# Altium PCB Main.PcbDoc
Units mil, origin at the board's own origin, x right, y up, seen from the top; angles counter-clockwise.
Board outline 1320 x 1790 mil, 2 copper layers (Top Layer, Bottom Layer); 8 components, 11 nets, 37 pads, 11 vias.
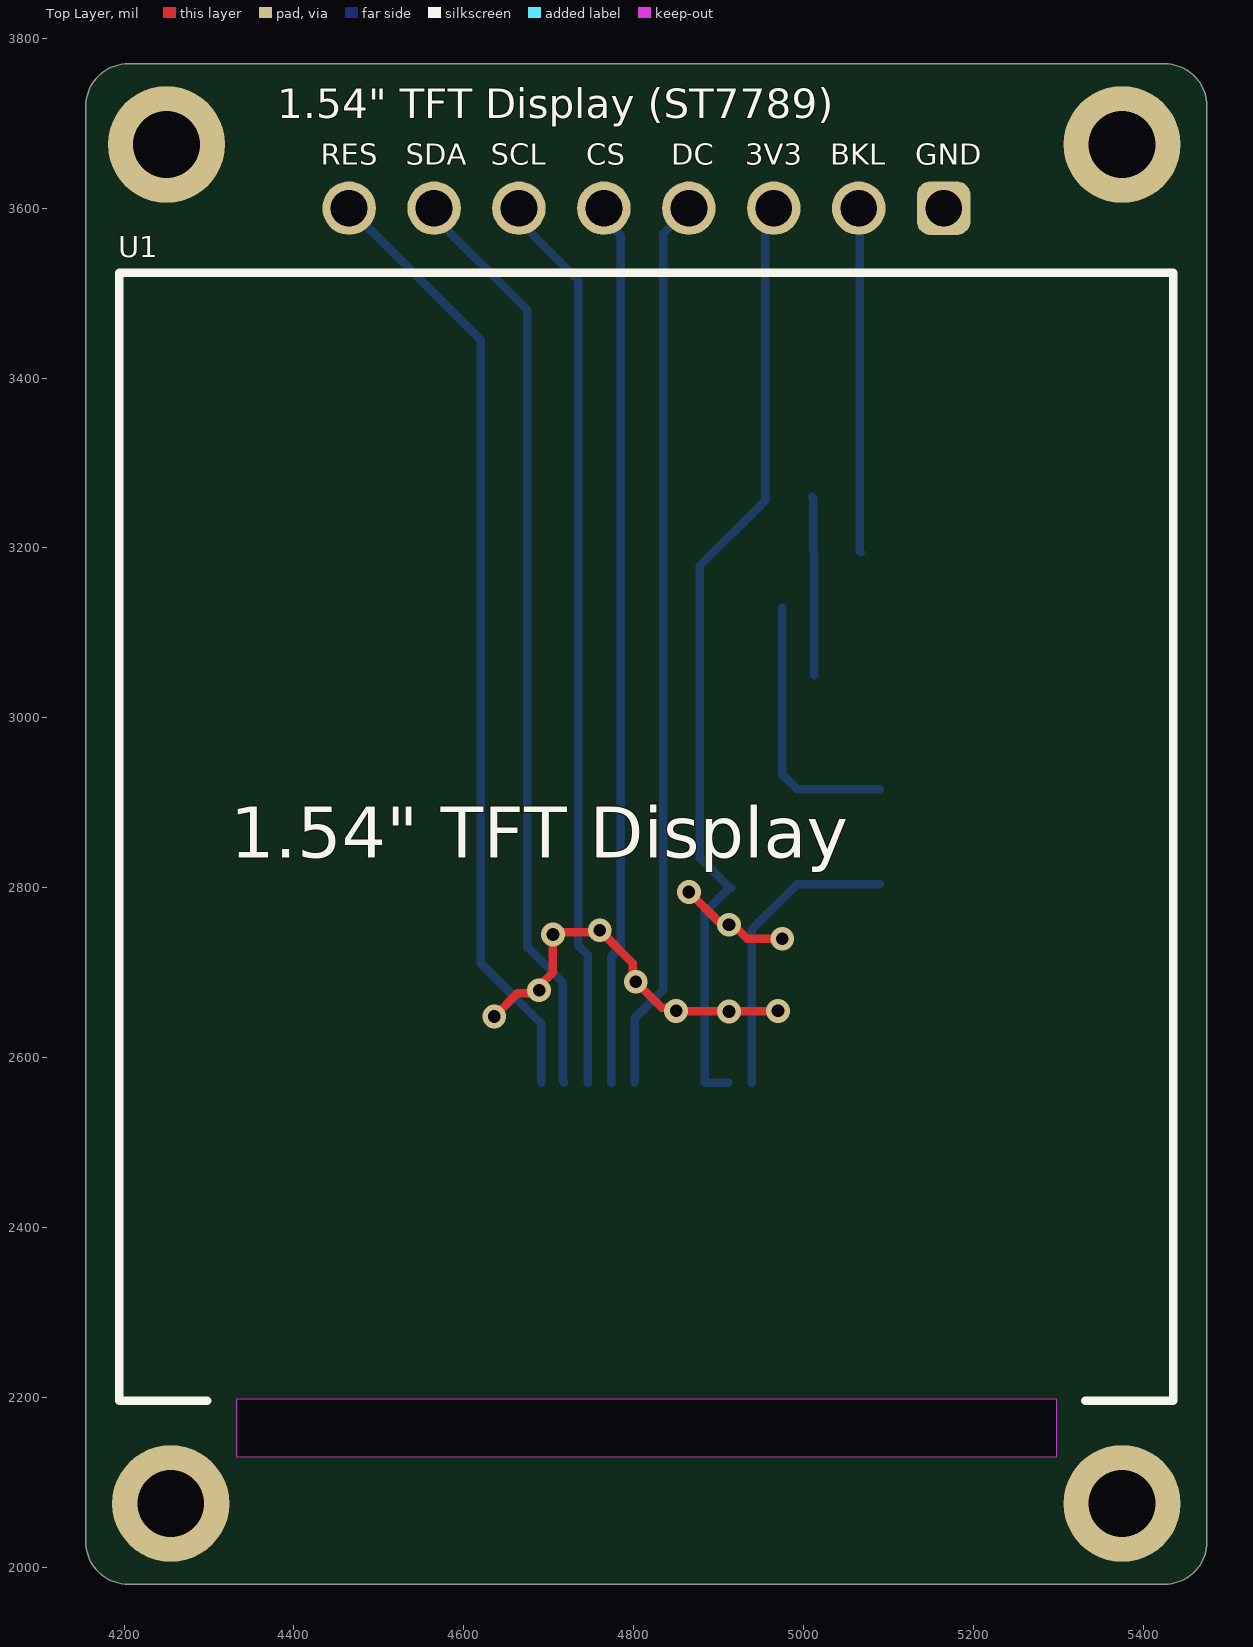
[diagram p0: Top Layer view]
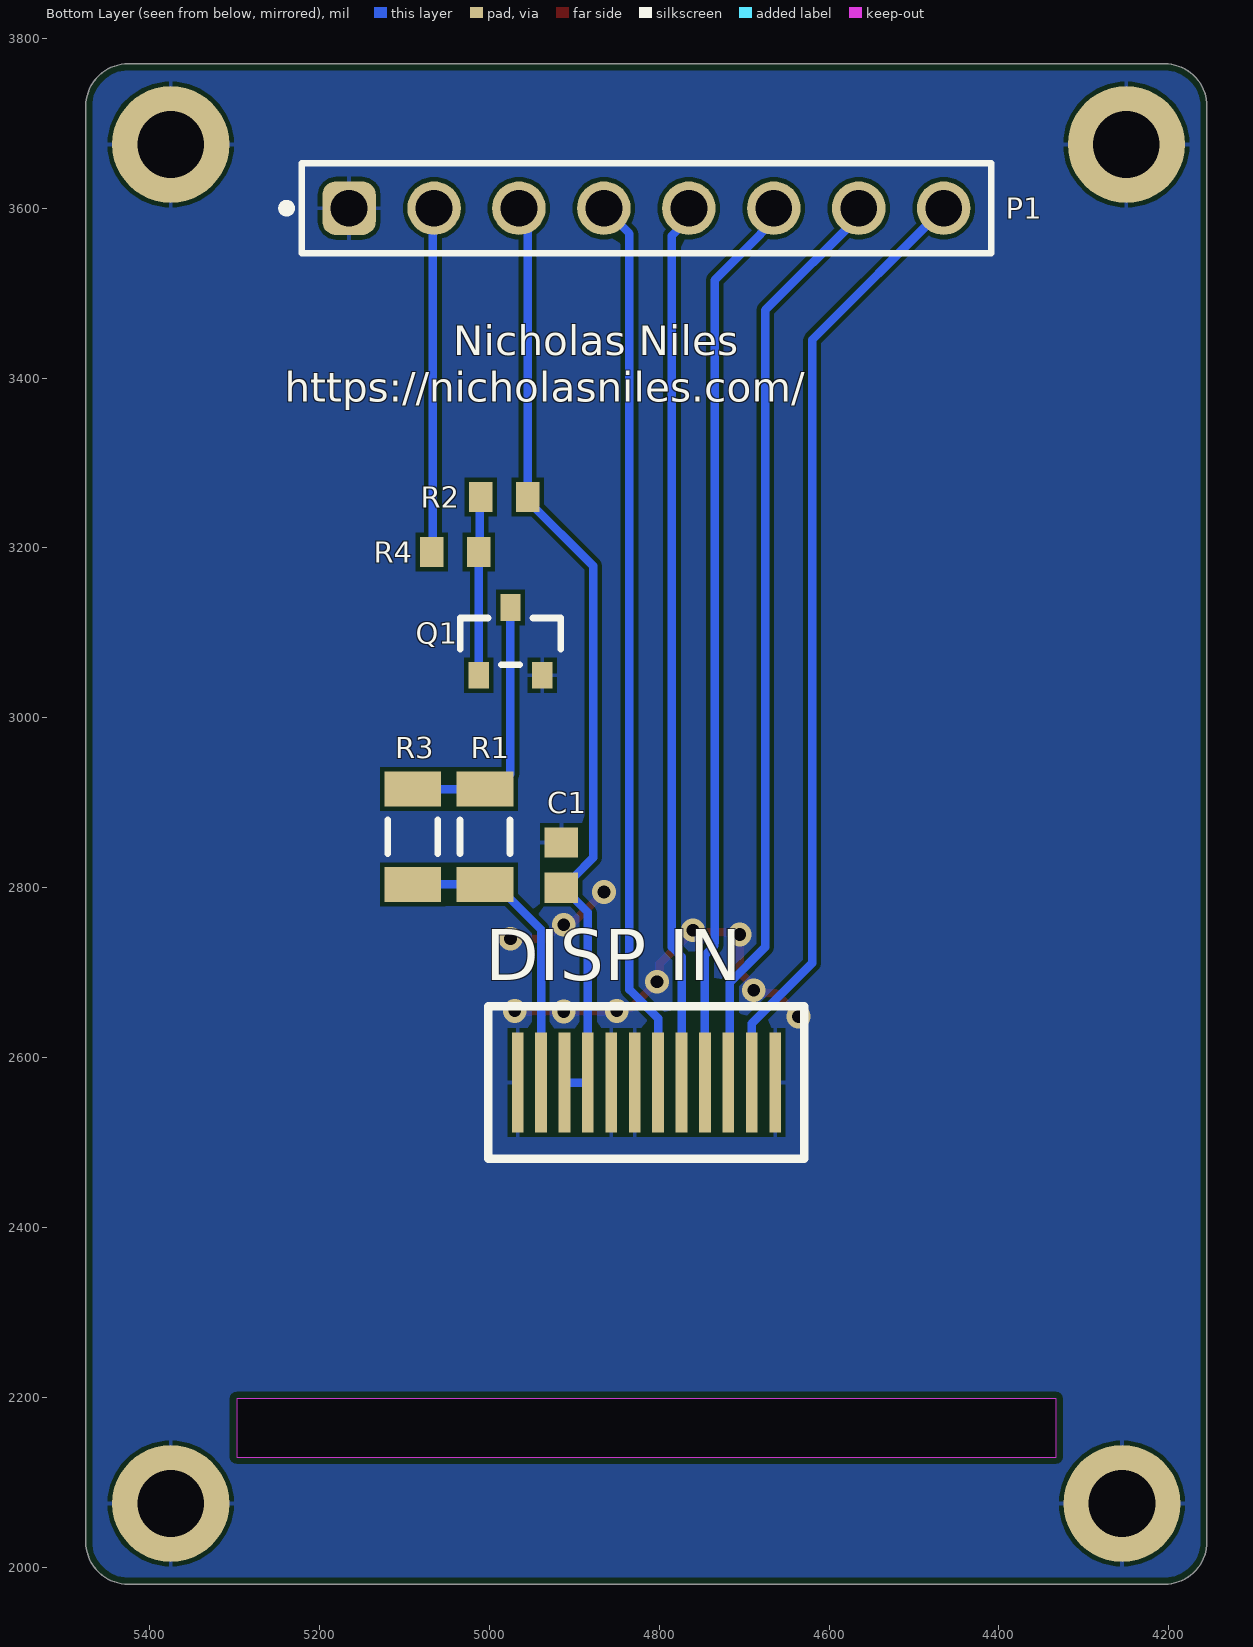
[diagram p1: Bottom Layer view, seen from below]

## Layer stack, top to bottom
Top Solder: solder mask 0.4, Solder Resist, Dk 3.5
Top Layer: signal copper 1.4
Dielectric 1: dielectric 12.6, FR-4, Dk 4.8
Bottom Layer: signal copper 1.4
Bottom Solder: solder mask 0.4, Solder Resist, Dk 3.5

## Board outline
4155,2030 4155,3720 cw(c4205,3720) 4205,3770 5425,3770 cw(c5425,3720) 5475,3720 5475,2030 cw(c5425,2030) 5425,1980 4205,1980 cw(c4205,2030)

## Design rules (kind name [scope] priority, off if disabled: settings)
BoardOutlineClearance [All] p1: gap=7.87 ignorepadtopadclearanceinfootprint=FALSE
Clearance [All] p1: gap=5 ignorepadtopadclearanceinfootprint=TRUE except(10: Arc-Hole Track-Hole SMDPad-Hole THPad-Hole Via-Hole Fill-Hole Poly-Hole Region-Hole Text-Hole)
ComponentClearance [All] p1: gap=5 collisioncheckmode=3 verticalgap=5 showdistances=TRUE
DiffPairsRouting [All] p1: maxlimit=10 minlimit=5 mostfreqgap=5 toplayer_minwidth=5 toplayer_maxwidth=1000 toplayer_prefwidth=5 bottomlayer_minwidth=5 bottomlayer_maxwidth=1000 bottomlayer_prefwidth=5 maxuncoupledlength=500
Height [All] p1: minheight=0 maxheight=71497.94 prefheight=500
HoleSize [All] p1: absolutevalues=TRUE maxlimit=248.03 minlimit=11.81 maxpercent=80.000 minpercent=20.000
HoleToHoleClearance [All] p1: gap=10 allowstackedmicrovias=FALSE
MinimumAnnularRing [All] p1: minimumring=6
MinimumSolderMaskSliver [All] p1: minsoldermaskwidth=6
PlaneClearance [All] p1: clearance=5
PlaneConnect PlaneConnectPowerPads [InPadClass('PowerPads')] p1: planeconnectstyle=Direct reliefexpansion=20 reliefentries=4 reliefconductorwidth=10 reliefairgap=10
PlaneConnect [All] p2: pad.planeconnectstyle=Relief pad.reliefexpansion=11.81 pad.reliefentries=4 pad.reliefconductorwidth=5 pad.reliefairgap=5 via.planeconnectstyle=Direct via.reliefexpansion=11.81 via.reliefentries=4 via.reliefconductorwidth=5 via.reliefairgap=5
PolygonConnect PolygonConnectPowerPads [All vs (InPadClass('PowerPads'))] p1: connectstyle=Direct reliefconductorwidth=10 reliefentries=4 polygonreliefangle="90 Angle" airgapwidth=10
PolygonConnect [All] p2: thpad.connectstyle=Relief thpad.reliefconductorwidth=5 thpad.reliefentries=4 thpad.polygonreliefangle="90 Angle" thpad.airgapwidth=5 smdpad.connectstyle=Relief smdpad.reliefconductorwidth=5 smdpad.reliefentries=4 smdpad.polygonreliefangle="90 Angle" smdpad.airgapwidth=5 via.connectstyle=Direct via.reliefconductorwidth=5 via.reliefentries=4 via.polygonreliefangle="90 Angle" via.airgapwidth=5
RoutingVias [All] p1: holewidth=11.81 width=23.62 viastyle="Through Hole" minholewidth=11.81 minwidth=23.62 maxholewidth=23.62 maxwidth=259.84
SilkToSilkClearance [All] p1: silktosilkclearance=5
SilkToSolderMaskClearance [IsPad] p1: minsilkscreentomaskgap=5 clearancetoexposedcopper=TRUE
SolderMaskExpansion [All] p1: expansion=2 istentingtop=FALSE
SupplyNets "Schematic Supply Nets_1" [InNet('3V3')] p1: voltage=0.000
SupplyNets "Schematic Supply Nets" [InNet('GND')] p2: voltage=0.000
UnRoutedNet [All] p1: checkbadconnections=TRUE
Width Width_10mil [All] p1: maxlimit=1000 minlimit=10 preferedwidth=10 minimp=50.000000 maximp=50.000000 favimp=50.000000
Width Width_6mil [All] p2: maxlimit=1000 minlimit=6 preferedwidth=6 minimp=50.000000 maximp=50.000000 favimp=50.000000
Width Power_20mil [All] p3: maxlimit=1000 minlimit=20 preferedwidth=20 minimp=50.000000 maximp=50.000000 favimp=50.000000
Width Power_12mil [All] p4: maxlimit=1000 minlimit=12 preferedwidth=12 minimp=50.000000 maximp=50.000000 favimp=50.000000
Width Width_5mil [All] p5: maxlimit=1000 minlimit=5 preferedwidth=5 minimp=50.000000 maximp=50.000000 favimp=50.000000
19 further rules are at their usual default settings.

## Components (designator, comment, footprint, x,y, rotation, side; value= is the part's Value field where it differs from the comment)
C1 "100nF" CAPC1608X87X35NL15T15 4915,2826.57 r90 bottom
P1 "61300811121" 61300811121 4815,3600 r180 bottom locked
Q1 "SS8050-G" FP-SS8050-G-MFG 4975,3090 r90 bottom
R1 "20" RESC3116X65X40NL10T20 5005,2860 r270 bottom
R2 "10k" RESC1608X55X25NL10T15 4982.44,3260 r180 bottom
R3 "20" RESC3116X65X40NL10T20 5090,2860 r270 bottom
R4 "1k" RESC1608X55X25NL10T15 5040,3195 r180 bottom
U1 "1.54\" TFT Display" PCBComponent_1 4815,2860 r0 top locked

## Footprints (in the part's own frame and the unit in brackets; to place one, negate y for a bottom-side part, rotate by r counter-clockwise, add the part's x,y. Pads: shape width x height; smd on the part's side, far side on the other; paste and mask are expansions set on the pad)
61300811121 [mm] "Pin Header, pitch 2.54 mm, THT, Vertical, single row, 8p"
  rrect50% 1.6x1.6 hole 1.1: 1(-8.89,0)
  round 1.6 hole 1.1: 2(-6.35,0) 3(-3.81,0) 4(-1.27,0) 5(1.27,0) 6(3.81,0) 7(6.35,0) 8(8.89,0)
  silkscreen extent -10.88,-1.35 10.31,1.35, body extent -10.16,-1.27 10.16,1.27, height 8.57
CAPC1608X87X35NL15T15 [mm] "Chip Capacitor, 2-Leads, Body 1.60x0.80mm, IPC Medium Density"
  rect 0.9x1 smd: 1(-0.675,0) 2(0.675,0)
  body extent -0.87,-0.48 0.87,0.47, height 0.87
FP-SS8050-G-MFG [mm]
  rect 0.8x0.6 smd paste+0 mask+0: 1(-1.01,0.95) 2(-1.01,-0.95) 3(1.01,0)
  silkscreen extent -0.7,-1.5 0.7,1.5, body extent -1.21,-1.45 1.21,1.45, height 1.15
PCBComponent_1 [mm]
  rect 0x0 / inner rect 1.524x1.524 / far side rect 0.35x3 all layers, no hole mask+0: 1(3.85,-7.35) 2(3.15,-7.35) 3(2.45,-7.35) 4(1.75,-7.35) 5(1.05,-7.35) 6(0.35,-7.35) 7(-0.35,-7.35) 8(-1.05,-7.35) 9(-1.75,-7.35) 10(-2.45,-7.35) 11(-3.15,-7.35) 12(-3.85,-7.35)
  Keep-Out Layer board cut-out: -12.25,-16.8 12.25,-16.8 12.25,-18.55 -12.25,-18.55
  silkscreen extent -15.76,-16.86 15.76,16.86
RESC1608X55X25NL10T15 [mm] "Chip Resistor, 2-Leads, Body 1.60x0.80mm, IPC Medium Density"
  rect 0.7x0.9 smd: 1(-0.7,0) 2(0.7,0)
  body extent -0.85,-0.45 0.85,0.45, height 0.55
RESC3116X65X40NL10T20 [mm] "Chip Resistor, 2-Leads, Body 3.10x1.60mm, IPC Medium Density"
  rect 1.05x1.7 smd: 1(-1.425,0) 2(1.425,0)
  silkscreen extent -0.5,-0.75 0.5,0.75, body extent -1.6,-0.85 1.6,0.85, height 0.65

## Part data
C1: library part CMP-2006-03301-1
P1: library part CMP-1502-01076-4, "THT Vertical Pin Header WR-PHD, Pitch 2.54 mm, Single Row, 8 pins", Color=Black, Contact Resistance=20mΩ, Current Rating=3A, Max Operating Temperature=105°C, Min Operating Temperature=-40°C, Operating Supply Voltage=250V, Connector Type="Male Pin", Contact Material=Gold, Contact Mating Length=5.9944mm, Contact Plating=Gold, Gender=Male, Height=8.54mm, Lead Pitch=2.54mm, Mount="Through Hole", Number of Contacts=8, Number of Pins=8, Number of Positions=8, Number of Rows=1, Orientation=Vertical, Packaging=Bulk, Pitch=2.54mm, RoHS=Compliant, Termination=Solder, Voltage Rating=250V
Q1: library part CMP-20235-000001-1, "NPN TRANSISTOR 1.5A 40V SOT-23 R", Case/Package=TO-236-3, Collector Emitter Breakdown Voltage=25V, Collector Emitter Voltage (VCEO)=400mV, Max Collector Current=1.5A, Max Power Dissipation=300mW, Transition Frequency=100MHz, Max Breakdown Voltage=25V, Mount="Surface Mount", Packaging="Tape and Reel", RoHS Compliant=Yes
R1 R3: library part CMP-2003-03957-1, Manufacturer=Yageo, Part Number=RC1206JR-0720RL
R2 R4: library part CMP-2000-04525-1, Manufacturer=Yageo, Part Number=RT0603BRE071KL

## Free pads (board coordinates)
  round 137.79 hole 78.74: 7(4250,3675) 7(4255,2075) 7(5375,2075) 7(5375,3675)

## Via types
v1: diameter 28, hole 15, Top Layer to Bottom Layer, tented both sides, 11 vias

## Nets (pads, with @x,y where several pads share a name; then routed paths per layer and width w, separated by ;. In a path a pad name is that pad's centre, name@x,y a point inside that pad or via, vN(x,y) a via of type N, cw(c..) or ccw(c..) an arc to the next point about the centre after c; other vN are vias at no path point)
3V3: C1.1 P1.3 R2.2 U1.3 U1.4 | length 1123.8
  Bottom Layer w10: U1.3 U1.4 4883.9,2770.87 C1.1@4913.03,2800 ; P1.3 4954.88,3589.88 R2.2 4954.88,3256.06 4877.57,3178.76 4877.57,2835.46 4900.31,2812.72 C1.1@4913.03,2800 ; C1.1@4913.03,2800 C1.1 C1.1@4913.03,2800
BKL: P1.2 R4.1 | length 406.1
  Bottom Layer w10: P1.2 5066.28,3598.72 5066.28,3196.28 R4.1
CS: P1.5 U1.8 | length 1042.4
  Bottom Layer w10: P1.5 4765,3587.65 4785,3567.65 4785,2730 4773.66,2718.66 U1.8
DC: P1.4 U1.7 | length 1055.8
  Bottom Layer w10: U1.7 4801.22,2646.22 4835,2680 4835,3570 P1.4
GND: C1.2 P1.1 pad.7 Q1.2 U1.1 U1.5 U1.6 U1.12 | length 588.5
  Top Layer w10: v1(4635.98,2648.48) 4663.28,2675.77 4685.27,2675.77 v1(4688.71,2679.21) 4688.71,2684.08 4705,2700.37 v1(4705,2745) 4707.5,2747.5 4757.5,2747.5 v1(4760,2750) 4799.15,2710.85 4799.15,2692.6 v1(4802.59,2689.16) 4833.31,2658.44 4846.56,2658.44 v1(4850,2655) 4850.38,2654.62 4911.81,2654.62 v1(4912.19,2654.25) 4912.57,2654.62 4969.62,2654.62 v1(4970,2655) ; v1(4865,2795) 4900.15,2759.85 4908.74,2759.85 v1(4912.19,2756.4) 4917.06,2756.4 4933.46,2740 v1(4975,2740)
LEDK: R1.2 R3.2 U1.2 | length 353.1
  Bottom Layer w10: U1.2 4939.02,2750.71 4992.2,2803.9 R1.2 R3.2
NetQ1_1: Q1.1 R2.1 R4.2 | length 210.8
  Bottom Layer w10: R2.1 5011.22,3258.78 5011.22,3196.22 R4.2 ; Q1.1@5012.42,3050.26 R4.2
NetQ1_3: Q1.3 R1.1 R3.1 | length 318.6
  Bottom Layer w10: Q1.3 4975,2933.31 4992.2,2916.1 R1.1 R3.1
RES: P1.8 U1.11 | length 1123
  Bottom Layer w10: P1.8 4620,3445 4620,2711.11 4690.98,2640.13 U1.11
SCL: P1.6 U1.9 | length 1063
  Bottom Layer w10: P1.6 4665,3585.66 4680.38,3570.28 4680.38,3569.62 4734.57,3515.43 4734.57,2735.43 4735,2735 4735,2731.72 4746.1,2720.61 U1.9
SDA: P1.7 U1.10 | length 1093
  Bottom Layer w10: P1.7 4565,3590 4675,3480 4675,2730 4716.65,2688.35 4716.65,2572.52 U1.10

## Polygon pours and split planes (outlines as drawn)
GND on Bottom Layer "NONET_L02_P-001" (solid, pour order 2): 4135,3795 5495,3795 5495,1960 4135,1960

## Silkscreen, mask and mechanical layers (free items; w line width, h text height)
Top Overlay:
  text "1.54\" TFT Display (ST7789)" at 4380.56,3706.18 h35
  text "RES" at 4431.68,3651 h25
  text "SDA" at 4531.68,3651 h25
  text "SCL" at 4631.68,3651 h25
  text "CS" at 4744.17,3651 h25
  text "DC" at 4844.17,3651 h25
  text "3V3" at 4931.68,3651 h25
  text "BKL" at 5031.68,3651 h25
  text "GND" at 5131.68,3651 h25
Bottom Overlay:
  text "Nicholas Niles" at 5042.43,3427.01 h35
  text "https://nicholasniles.com/" at 5240.7,3372.01 h35
Mechanical 1:
  the board outline again, w10

## Text inside footprints (layer, text, board x,y; h text height)
U1: Bottom Overlay "DISP IN" at 5004.94,2690.87 h60